# Altium PCB Switch Board.PcbDoc
Units mm, origin at the board's own origin, x right, y up, seen from the top; angles counter-clockwise.
Board outline 14 x 14 mm, 2 copper layers (Top Layer, Bottom Layer); 3 components, 2 nets, 6 pads, 2 vias.
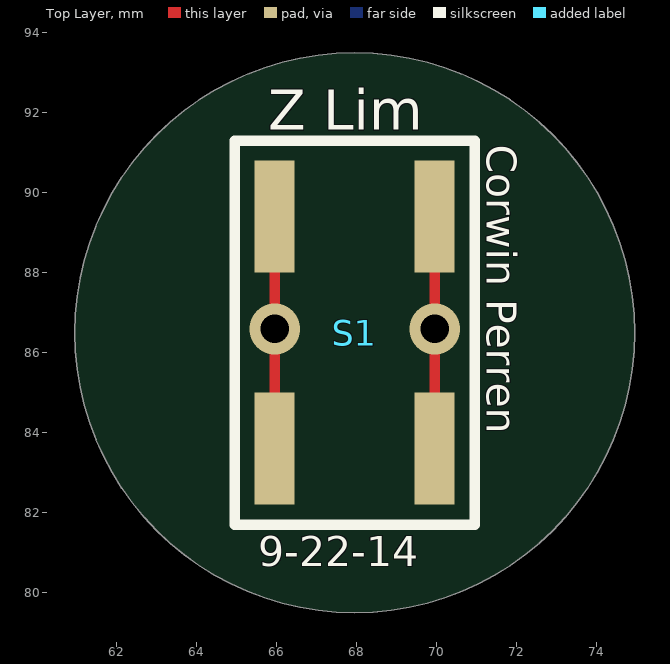
[diagram p0: Top Layer view]
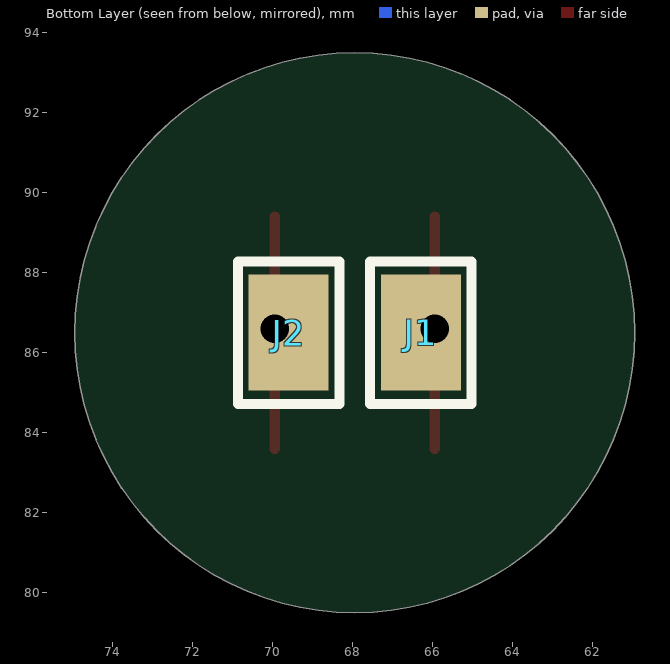
[diagram p1: Bottom Layer view, seen from below]

## Layer stack, top to bottom
Top Solder: solder mask 0.0102, Solder Resist, Dk 3.5
Top Layer: signal copper 0.0356
Dielectric 1: dielectric 0.32, FR-4, Dk 4.8
Bottom Layer: signal copper 0.0356
Bottom Solder: solder mask 0.0102, Solder Resist, Dk 3.5

## Board outline
67.945,79.487 cw(c67.945,86.487) 60.945,86.487 cw(c67.945,86.487) 67.945,93.487 cw(c67.945,86.487) 74.945,86.487 cw(c67.945,86.487)

## Design rules (kind name [scope] priority, off if disabled: settings)
Clearance [All] p1: gap=0.254
PolygonConnect [All] p1: connectstyle=Relief reliefconductorwidth=0.254 reliefentries=4 polygonreliefangle="90 Angle" airgapwidth=0.254
RoutingVias [All] p1: holewidth=0.711 width=1.27 viastyle="Through Hole" minholewidth=0.711 minwidth=1.27 maxholewidth=0.711 maxwidth=1.27
SolderMaskExpansion [All] p1: expansion=0.102
UnpouredPolygon [All] p1: allowunpoured=FALSE
Width [All] p1: maxlimit=0.254 minlimit=0.254 preferedwidth=0.254
29 further rules are at their usual default settings.

## Components (designator, comment, footprint, x,y, rotation, side; value= is the part's Value field where it differs from the comment)
J1 "CONTACT IDC 1 POS SMD 22AWG" "CONTACT IDC 1 POS SMD 22AWG" 66.294,86.487 r90 bottom
J2 "CONTACT IDC 1 POS SMD 22AWG" "CONTACT IDC 1 POS SMD 22AWG" 69.596,86.487 r90 bottom
S1 "KSEM31J LFS Tactile Switch" "KSEM31J LFS Tactile Switch" 65.945,83.587 r90 top

## Footprints (in the part's own frame and the unit in brackets; to place one, negate y for a bottom-side part, rotate by r counter-clockwise, add the part's x,y. Pads: shape width x height; smd on the part's side, far side on the other; paste and mask are expansions set on the pad)
"CONTACT IDC 1 POS SMD 22AWG" [mm]
  rect 2.9x2 smd: 1(0,0)
  silkscreen extent -1.78,-1.27 1.78,1.27
"KSEM31J LFS Tactile Switch" [mm]
  rect 2.8x1 smd: 1(0,0) 2(0,-4) 3(5.8,-4) 4(5.8,0)
  silkscreen extent -1.9,-5 7.7,1

## Via types
v1: diameter 1.27, hole 0.711, Top Layer to Bottom Layer, 2 vias

## Nets (pads, with @x,y where several pads share a name; then routed paths per layer and width w, separated by ;. In a path a pad name is that pad's centre, name@x,y a point inside that pad or via, vN(x,y) a via of type N, cw(c..) or ccw(c..) an arc to the next point about the centre after c; other vN are vias at no path point)
NetJ1_1: J1.1 S1.1 S1.4 | length 6.2
  Top Layer w0.254: S1.1 v1(65.945,86.582) S1.4
  Bottom Layer w0.254: v1(65.945,86.582) 66.04,86.487 J1.1
NetJ2_1: J2.1 S1.2 S1.3 | length 6.2
  Top Layer w0.254: S1.2 v1(69.945,86.582) S1.3
  Bottom Layer w0.254: J2.1 69.85,86.487 v1(69.945,86.582)

## Silkscreen, mask and mechanical layers (free items; w line width, h text height)
Top Overlay:
  text "Z Lim" at 65.786,91.567 h1
  text "Corwin Perren" at 71.247,91.186 h0.75 r270
  text "9-22-14" at 65.532,80.645 h0.75